# Altium PCB DSP6748_F.PcbDoc (part 2 of 16)
Units mil, origin at the board's own origin, x right, y up, seen from the top; angles counter-clockwise.
Board outline 8188.98 x 4055.12 mil, 4 copper layers (Top Layer, GND, VCC, Bottom Layer); 409 components, 262 nets, 1424 pads, 350 vias.
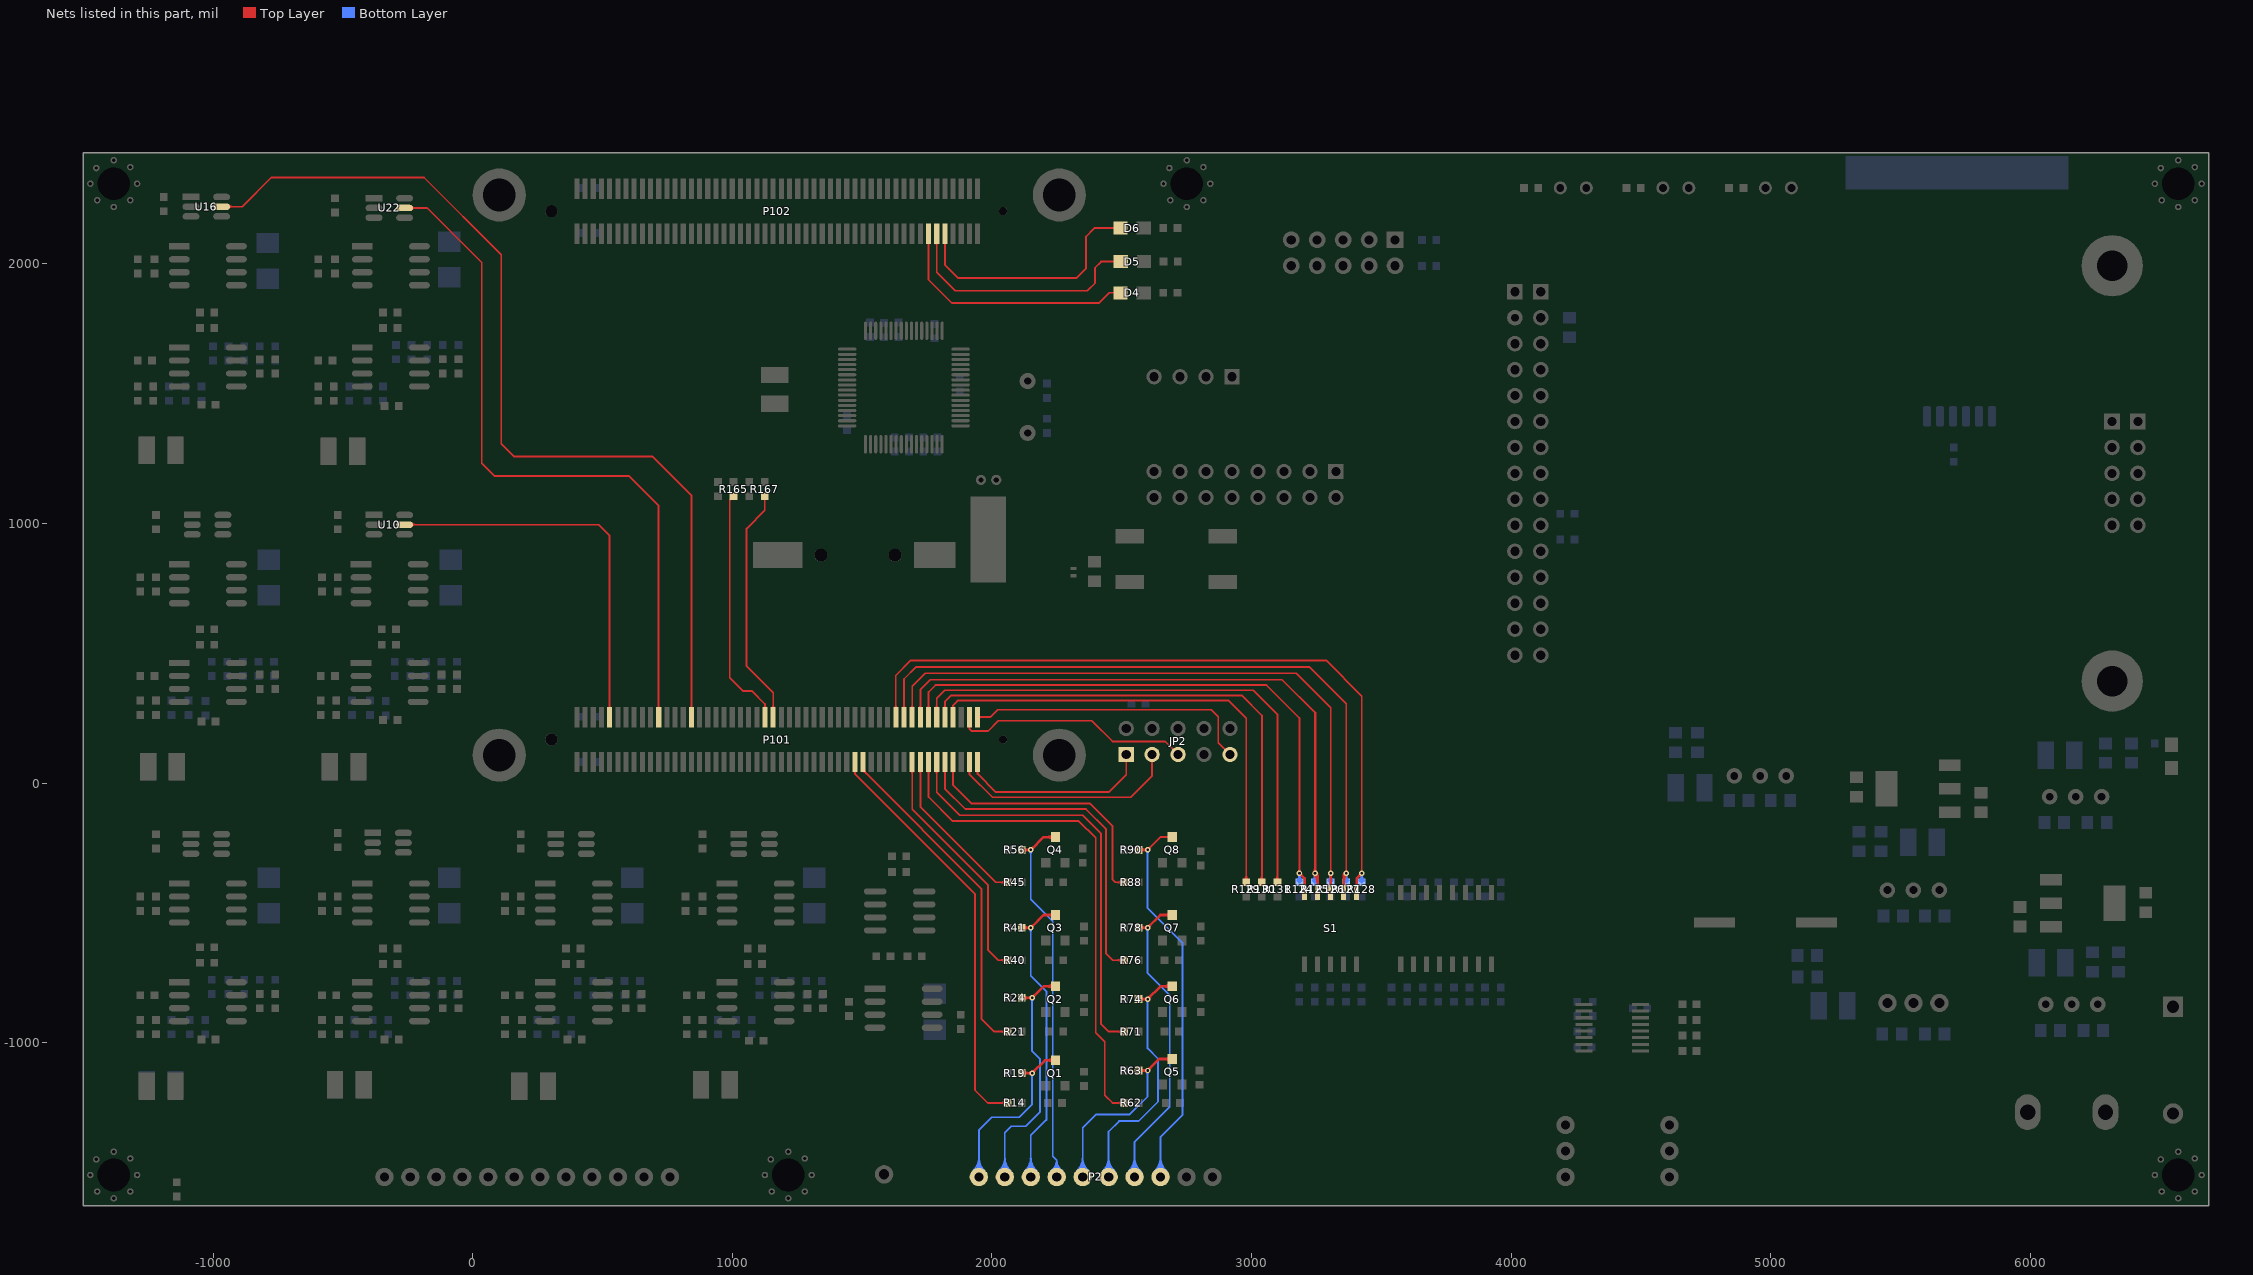
[diagram p4: the nets of this part, all layers, seen from the top]

## Via types
v1: diameter 21, hole 10, Top Layer to Bottom Layer, 244 vias
v2: diameter 20, hole 10, Top Layer to Bottom Layer, 84 vias
v3: diameter 32, hole 16, Top Layer to Bottom Layer, 11 vias
v4: diameter 24, hole 12, Top Layer to Bottom Layer, 7 vias
v5: diameter 39.37, hole 19.68, Top Layer to Bottom Layer, 3 vias
v6: diameter 30, hole 15, Top Layer to Bottom Layer, 1 vias

## Nets (pads, with @x,y where several pads share a name; then routed paths per layer and width w, separated by ;. In a path a pad name is that pad's centre, name@x,y a point inside that pad or via, vN(x,y) a via of type N, cw(c..) or ccw(c..) an arc to the next point about the centre after c; other vN are vias at no path point) (continued)
AD7276_SDATA6: P101.10 U10.5 | length 1632.5
  Top Layer w7: U10.5@-262.08,995.12 485.55,995.12 527.56,953.11 P101.10@527.56,254.13 ; P101.10@523.07,288.14 ccw(c512.24,298.97) 527.56,298.97 ccw(c542.88,298.97) P101.10@532.05,288.14 ; U10.5@-235.72,988.75 cw(c-220.35,973.39) -220.35,995.12 ; U10.5@-235.72,988.75 cw(c-220.35,973.39) -220.35,995.12 ; U10.5@-235.72,988.75 cw(c-220.35,973.39) -220.35,995.12 ; U10.5@-235.72,1001.48 ccw(c-220.35,1016.85) -220.35,995.12 ; U10.5@-235.72,1001.48 ccw(c-220.35,1016.85) -220.35,995.12 ; U10.5@-235.72,1001.48 ccw(c-220.35,1016.85) -220.35,995.12
AD7276_SDATA7: P101.30 U16.5 | length 3770
  Top Layer w7: U16.5@-967.08,2220.12 -887.59,2220.12 -775.19,2332.52 -187.52,2332.52 109.81,2035.19 109.81,1307.52 159.81,1257.52 693.15,1257.52 842.52,1108.15 P101.30@842.52,254.13 ; P101.30@838.03,288.14 ccw(c827.2,298.97) 842.52,298.97 ccw(c857.84,298.97) P101.30@847.01,288.14 ; U16.5@-940.72,2213.75 cw(c-925.35,2198.39) -925.35,2220.12 ; U16.5@-940.72,2213.75 cw(c-925.35,2198.39) -925.35,2220.12 ; U16.5@-940.72,2213.75 cw(c-925.35,2198.39) -925.35,2220.12 ; U16.5@-940.72,2226.48 ccw(c-925.35,2241.85) -925.35,2220.12 ; U16.5@-940.72,2226.48 ccw(c-925.35,2241.85) -925.35,2220.12 ; U16.5@-940.72,2226.48 ccw(c-925.35,2241.85) -925.35,2220.12
AD7276_SDATA8: P101.22 U22.5 | length 2847
  Top Layer w7: U22.5@-262.08,2215.12 -175.12,2215.12 34.81,2005.19 34.81,1232.52 84.81,1182.52 603.15,1182.52 715.55,1070.12 P101.22@715.55,254.13 ; P101.22@712.05,288.14 ccw(c703.6,296.59) 715.55,296.59 ; 715.55,301.35 ccw(c734.24,301.35) P101.22@721.03,288.14 ; U22.5@-235.72,2208.75 cw(c-220.35,2193.39) -220.35,2215.12 ; U22.5@-235.72,2208.75 cw(c-220.35,2193.39) -220.35,2215.12 ; U22.5@-235.72,2208.75 cw(c-220.35,2193.39) -220.35,2215.12 ; U22.5@-235.72,2221.48 ccw(c-220.35,2236.85) -220.35,2215.12 ; U22.5@-235.72,2221.48 ccw(c-220.35,2236.85) -220.35,2215.12 ; U22.5@-235.72,2221.48 ccw(c-220.35,2236.85) -220.35,2215.12
AST1: P2.1 Q1.3 R19.2 | length 1443.7
  Top Layer w10: R19.2@2114.81,-1117.48 v1(2154.81,-1117.48) 2204.02,-1068.27 Q1.3@2244.81,-1068.27 ; R19.2@2121.88,-1124.55 cw(c2138.95,-1141.62) 2138.95,-1117.48 ; R19.2@2121.88,-1124.55 cw(c2138.95,-1141.62) 2138.95,-1117.48 ; R19.2@2121.88,-1124.55 cw(c2138.95,-1141.62) 2138.95,-1117.48 ; R19.2@2121.88,-1110.41 ccw(c2138.95,-1093.34) 2138.95,-1117.48 ; R19.2@2121.88,-1110.41 ccw(c2138.95,-1093.34) 2138.95,-1117.48 ; R19.2@2121.88,-1110.41 ccw(c2138.95,-1093.34) 2138.95,-1117.48 ; 2141.53,-1117.48 cw(c2141.53,-1130.76) v1@2150.92,-1121.37 ; 2141.53,-1117.48 ccw(c2141.53,-1104.2) v1@2150.92,-1113.59 ; 2141.53,-1117.48 cw(c2141.53,-1130.76) v1@2150.92,-1121.37 ; 2141.53,-1117.48 ccw(c2141.53,-1104.2) v1@2150.92,-1113.59 ; 2141.53,-1117.48 ccw(c2141.53,-1104.2) v1@2150.92,-1113.59 ; 2141.53,-1117.48 cw(c2141.53,-1130.76) v1@2150.92,-1121.37 ; v1@2154.81,-1111.98 ccw(c2154.81,-1098.7) 2164.2,-1108.09 ; v1@2154.81,-1111.98 ccw(c2154.81,-1098.7) 2164.2,-1108.09 ; v1@2154.81,-1111.98 ccw(c2154.81,-1098.7) 2164.2,-1108.09 ; v1@2160.31,-1117.48 cw(c2173.59,-1117.48) 2164.2,-1108.09 ; v1@2160.31,-1117.48 cw(c2173.59,-1117.48) 2164.2,-1108.09 ; v1@2160.31,-1117.48 cw(c2173.59,-1117.48) 2164.2,-1108.09 ; 2214.11,-1068.27 cw(c2214.11,-1098.97) Q1.3@2235.82,-1077.26 ; 2214.11,-1068.27 ccw(c2214.11,-1037.57) Q1.3@2235.82,-1059.28 ; 2214.11,-1068.27 cw(c2214.11,-1098.97) Q1.3@2235.82,-1077.26 ; 2214.11,-1068.27 ccw(c2214.11,-1037.57) Q1.3@2235.82,-1059.28 ; 2214.11,-1068.27 ccw(c2214.11,-1037.57) Q1.3@2235.82,-1059.28 ; 2214.11,-1068.27 cw(c2214.11,-1098.97) Q1.3@2235.82,-1077.26
  Bottom Layer w7: P2.1@1927.23,-1494.9 ccw(c1872.72,-1440.39) 1949.81,-1440.39 ccw(c2026.9,-1440.39) P2.1@1972.39,-1494.9 ; P2.1@1932.18,-1499.85 ccw(c1889.62,-1457.29) 1949.81,-1457.29 ccw(c2010,-1457.29) P2.1@1967.44,-1499.85 ; P2.1@1937.13,-1504.8 ccw(c1906.52,-1474.19) 1949.81,-1474.19 ccw(c1993.1,-1474.19) P2.1@1962.49,-1504.8 ; P2.1@1949.81,-1517.48 1949.81,-1337.48 1999.81,-1287.48 2104.81,-1287.48 2154.81,-1237.48 v1(2154.81,-1117.48) ; v1@2149.86,-1122.43 cw(c2137.91,-1134.38) 2154.81,-1134.38 ; v1@2149.86,-1122.43 cw(c2137.91,-1134.38) 2154.81,-1134.38 ; v1@2149.86,-1122.43 cw(c2137.91,-1134.38) 2154.81,-1134.38 ; 2154.81,-1134.38 cw(c2171.71,-1134.38) v1@2159.76,-1122.43 ; 2154.81,-1134.38 cw(c2171.71,-1134.38) v1@2159.76,-1122.43 ; 2154.81,-1134.38 cw(c2171.71,-1134.38) v1@2159.76,-1122.43
AST2: P2.2 Q2.3 R24.2 | length 2253.1
  Top Layer w10: R24.2@2114.81,-827.48 v1(2154.81,-827.48) 2199.02,-783.27 Q2.3@2244.81,-783.27 ; R24.2@2121.88,-834.55 cw(c2138.95,-851.62) 2138.95,-827.48 ; R24.2@2121.88,-834.55 cw(c2138.95,-851.62) 2138.95,-827.48 ; R24.2@2121.88,-834.55 cw(c2138.95,-851.62) 2138.95,-827.48 ; R24.2@2121.88,-820.41 ccw(c2138.95,-803.34) 2138.95,-827.48 ; R24.2@2121.88,-820.41 ccw(c2138.95,-803.34) 2138.95,-827.48 ; R24.2@2121.88,-820.41 ccw(c2138.95,-803.34) 2138.95,-827.48 ; 2141.53,-827.48 cw(c2141.53,-840.76) v1@2150.92,-831.37 ; 2141.53,-827.48 ccw(c2141.53,-814.2) v1@2150.92,-823.59 ; 2141.53,-827.48 cw(c2141.53,-840.76) v1@2150.92,-831.37 ; 2141.53,-827.48 ccw(c2141.53,-814.2) v1@2150.92,-823.59 ; 2141.53,-827.48 ccw(c2141.53,-814.2) v1@2150.92,-823.59 ; 2141.53,-827.48 cw(c2141.53,-840.76) v1@2150.92,-831.37 ; v1@2154.81,-821.98 ccw(c2154.81,-808.7) 2164.2,-818.09 ; v1@2154.81,-821.98 ccw(c2154.81,-808.7) 2164.2,-818.09 ; v1@2154.81,-821.98 ccw(c2154.81,-808.7) 2164.2,-818.09 ; v1@2160.31,-827.48 cw(c2173.59,-827.48) 2164.2,-818.09 ; v1@2160.31,-827.48 cw(c2173.59,-827.48) 2164.2,-818.09 ; v1@2160.31,-827.48 cw(c2173.59,-827.48) 2164.2,-818.09 ; 2214.11,-783.27 cw(c2214.11,-813.97) Q2.3@2235.82,-792.26 ; 2214.11,-783.27 ccw(c2214.11,-752.57) Q2.3@2235.82,-774.28 ; 2214.11,-783.27 cw(c2214.11,-813.97) Q2.3@2235.82,-792.26 ; 2214.11,-783.27 ccw(c2214.11,-752.57) Q2.3@2235.82,-774.28 ; 2214.11,-783.27 ccw(c2214.11,-752.57) Q2.3@2235.82,-774.28 ; 2214.11,-783.27 cw(c2214.11,-813.97) Q2.3@2235.82,-792.26
  Bottom Layer w7: P2.2@2049.81,-1517.48 2049.81,-1347.48 2074.81,-1322.48 2129.81,-1322.48 2184.81,-1267.48 2184.81,-1062.48 2154.81,-1032.48 v1(2154.81,-827.48) ; P2.2@2027.23,-1494.9 ccw(c1972.72,-1440.39) 2049.81,-1440.39 ; P2.2@2027.23,-1494.9 ccw(c1972.72,-1440.39) 2049.81,-1440.39 ; P2.2@2027.23,-1494.9 ccw(c1972.72,-1440.39) 2049.81,-1440.39 ; P2.2@2032.18,-1499.85 ccw(c1989.62,-1457.29) 2049.81,-1457.29 ; P2.2@2032.18,-1499.85 ccw(c1989.62,-1457.29) 2049.81,-1457.29 ; P2.2@2032.18,-1499.85 ccw(c1989.62,-1457.29) 2049.81,-1457.29 ; P2.2@2037.13,-1504.8 ccw(c2006.52,-1474.19) 2049.81,-1474.19 ; P2.2@2037.13,-1504.8 ccw(c2006.52,-1474.19) 2049.81,-1474.19 ; P2.2@2037.13,-1504.8 ccw(c2006.52,-1474.19) 2049.81,-1474.19 ; 2049.81,-1474.19 ccw(c2093.1,-1474.19) P2.2@2062.49,-1504.8 ; 2049.81,-1474.19 ccw(c2093.1,-1474.19) P2.2@2062.49,-1504.8 ; 2049.81,-1474.19 ccw(c2093.1,-1474.19) P2.2@2062.49,-1504.8 ; 2049.81,-1457.29 ccw(c2110,-1457.29) P2.2@2067.44,-1499.85 ; 2049.81,-1457.29 ccw(c2110,-1457.29) P2.2@2067.44,-1499.85 ; 2049.81,-1457.29 ccw(c2110,-1457.29) P2.2@2067.44,-1499.85 ; 2049.81,-1440.39 ccw(c2126.9,-1440.39) P2.2@2072.39,-1494.9 ; 2049.81,-1440.39 ccw(c2126.9,-1440.39) P2.2@2072.39,-1494.9 ; 2049.81,-1440.39 ccw(c2126.9,-1440.39) P2.2@2072.39,-1494.9 ; v1@2149.86,-832.43 cw(c2137.91,-844.38) 2154.81,-844.38 ; v1@2149.86,-832.43 cw(c2137.91,-844.38) 2154.81,-844.38 ; v1@2149.86,-832.43 cw(c2137.91,-844.38) 2154.81,-844.38 ; 2154.81,-844.38 cw(c2171.71,-844.38) v1@2159.76,-832.43 ; 2154.81,-844.38 cw(c2171.71,-844.38) v1@2159.76,-832.43 ; 2154.81,-844.38 cw(c2171.71,-844.38) v1@2159.76,-832.43
AST3: P2.3 Q3.3 R41.2 | length 2474.3
  Top Layer w10: R41.2@2114.81,-557.48 v1(2149.81,-557.48) 2199.02,-508.27 Q3.3@2244.81,-508.27 ; R41.2@2121.88,-564.55 cw(c2138.95,-581.62) 2138.95,-557.48 ; R41.2@2121.88,-564.55 cw(c2138.95,-581.62) 2138.95,-557.48 ; R41.2@2121.88,-564.55 cw(c2138.95,-581.62) 2138.95,-557.48 ; R41.2@2121.88,-550.41 ccw(c2138.95,-533.34) 2138.95,-557.48 ; R41.2@2121.88,-550.41 ccw(c2138.95,-533.34) 2138.95,-557.48 ; R41.2@2121.88,-550.41 ccw(c2138.95,-533.34) 2138.95,-557.48 ; 2136.53,-557.48 cw(c2136.53,-570.76) v1@2145.92,-561.37 ; 2136.53,-557.48 ccw(c2136.53,-544.2) v1@2145.92,-553.59 ; 2136.53,-557.48 cw(c2136.53,-570.76) v1@2145.92,-561.37 ; 2136.53,-557.48 ccw(c2136.53,-544.2) v1@2145.92,-553.59 ; 2136.53,-557.48 ccw(c2136.53,-544.2) v1@2145.92,-553.59 ; 2136.53,-557.48 cw(c2136.53,-570.76) v1@2145.92,-561.37 ; v1@2149.81,-551.98 ccw(c2149.81,-538.7) 2159.2,-548.09 ; v1@2149.81,-551.98 ccw(c2149.81,-538.7) 2159.2,-548.09 ; v1@2149.81,-551.98 ccw(c2149.81,-538.7) 2159.2,-548.09 ; v1@2155.31,-557.48 cw(c2168.59,-557.48) 2159.2,-548.09 ; v1@2155.31,-557.48 cw(c2168.59,-557.48) 2159.2,-548.09 ; v1@2155.31,-557.48 cw(c2168.59,-557.48) 2159.2,-548.09 ; 2214.11,-508.27 cw(c2214.11,-538.97) Q3.3@2235.82,-517.26 ; 2214.11,-508.27 ccw(c2214.11,-477.57) Q3.3@2235.82,-499.28 ; 2214.11,-508.27 cw(c2214.11,-538.97) Q3.3@2235.82,-517.26 ; 2214.11,-508.27 ccw(c2214.11,-477.57) Q3.3@2235.82,-499.28 ; 2214.11,-508.27 ccw(c2214.11,-477.57) Q3.3@2235.82,-499.28 ; 2214.11,-508.27 cw(c2214.11,-538.97) Q3.3@2235.82,-517.26
  Bottom Layer w7: P2.3@2149.81,-1517.48 2149.81,-1357.48 2209.81,-1297.48 2209.81,-802.48 2149.81,-742.48 v1(2149.81,-557.48) ; P2.3@2127.23,-1494.9 ccw(c2072.72,-1440.39) 2149.81,-1440.39 ; P2.3@2127.23,-1494.9 ccw(c2072.72,-1440.39) 2149.81,-1440.39 ; P2.3@2127.23,-1494.9 ccw(c2072.72,-1440.39) 2149.81,-1440.39 ; P2.3@2132.18,-1499.85 ccw(c2089.62,-1457.29) 2149.81,-1457.29 ; P2.3@2132.18,-1499.85 ccw(c2089.62,-1457.29) 2149.81,-1457.29 ; P2.3@2132.18,-1499.85 ccw(c2089.62,-1457.29) 2149.81,-1457.29 ; P2.3@2137.13,-1504.8 ccw(c2106.52,-1474.19) 2149.81,-1474.19 ; P2.3@2137.13,-1504.8 ccw(c2106.52,-1474.19) 2149.81,-1474.19 ; P2.3@2137.13,-1504.8 ccw(c2106.52,-1474.19) 2149.81,-1474.19 ; v1@2144.86,-562.43 cw(c2132.91,-574.38) 2149.81,-574.38 ; v1@2144.86,-562.43 cw(c2132.91,-574.38) 2149.81,-574.38 ; v1@2144.86,-562.43 cw(c2132.91,-574.38) 2149.81,-574.38 ; 2149.81,-1474.19 ccw(c2193.1,-1474.19) P2.3@2162.49,-1504.8 ; 2149.81,-1474.19 ccw(c2193.1,-1474.19) P2.3@2162.49,-1504.8 ; 2149.81,-1474.19 ccw(c2193.1,-1474.19) P2.3@2162.49,-1504.8 ; 2149.81,-1457.29 ccw(c2210,-1457.29) P2.3@2167.44,-1499.85 ; 2149.81,-1457.29 ccw(c2210,-1457.29) P2.3@2167.44,-1499.85 ; 2149.81,-1457.29 ccw(c2210,-1457.29) P2.3@2167.44,-1499.85 ; 2149.81,-1440.39 ccw(c2226.9,-1440.39) P2.3@2172.39,-1494.9 ; 2149.81,-1440.39 ccw(c2226.9,-1440.39) P2.3@2172.39,-1494.9 ; 2149.81,-1440.39 ccw(c2226.9,-1440.39) P2.3@2172.39,-1494.9 ; 2149.81,-574.38 cw(c2166.71,-574.38) v1@2154.76,-562.43 ; 2149.81,-574.38 cw(c2166.71,-574.38) v1@2154.76,-562.43 ; 2149.81,-574.38 cw(c2166.71,-574.38) v1@2154.76,-562.43
AST4: P2.4 Q4.3 R56.2 | length 2129.7
  Top Layer w10: R56.2@2114.81,-257.48 v1(2149.81,-257.48) 2199.02,-208.27 Q4.3@2244.81,-208.27 ; R56.2@2121.88,-264.55 cw(c2138.95,-281.62) 2138.95,-257.48 ; R56.2@2121.88,-264.55 cw(c2138.95,-281.62) 2138.95,-257.48 ; R56.2@2121.88,-264.55 cw(c2138.95,-281.62) 2138.95,-257.48 ; R56.2@2121.88,-250.41 ccw(c2138.95,-233.34) 2138.95,-257.48 ; R56.2@2121.88,-250.41 ccw(c2138.95,-233.34) 2138.95,-257.48 ; R56.2@2121.88,-250.41 ccw(c2138.95,-233.34) 2138.95,-257.48 ; 2136.53,-257.48 cw(c2136.53,-270.76) v1@2145.92,-261.37 ; 2136.53,-257.48 ccw(c2136.53,-244.2) v1@2145.92,-253.59 ; 2136.53,-257.48 cw(c2136.53,-270.76) v1@2145.92,-261.37 ; 2136.53,-257.48 ccw(c2136.53,-244.2) v1@2145.92,-253.59 ; 2136.53,-257.48 ccw(c2136.53,-244.2) v1@2145.92,-253.59 ; 2136.53,-257.48 cw(c2136.53,-270.76) v1@2145.92,-261.37 ; v1@2149.81,-251.98 ccw(c2149.81,-238.7) 2159.2,-248.09 ; v1@2149.81,-251.98 ccw(c2149.81,-238.7) 2159.2,-248.09 ; v1@2149.81,-251.98 ccw(c2149.81,-238.7) 2159.2,-248.09 ; v1@2155.31,-257.48 cw(c2168.59,-257.48) 2159.2,-248.09 ; v1@2155.31,-257.48 cw(c2168.59,-257.48) 2159.2,-248.09 ; v1@2155.31,-257.48 cw(c2168.59,-257.48) 2159.2,-248.09 ; 2214.11,-208.27 cw(c2214.11,-238.97) Q4.3@2235.82,-217.26 ; 2214.11,-208.27 ccw(c2214.11,-177.57) Q4.3@2235.82,-199.28 ; 2214.11,-208.27 cw(c2214.11,-238.97) Q4.3@2235.82,-217.26 ; 2214.11,-208.27 ccw(c2214.11,-177.57) Q4.3@2235.82,-199.28 ; 2214.11,-208.27 ccw(c2214.11,-177.57) Q4.3@2235.82,-199.28 ; 2214.11,-208.27 cw(c2214.11,-238.97) Q4.3@2235.82,-217.26
  Bottom Layer w7: v1(2149.81,-257.48) 2149.81,-447.48 2234.81,-532.48 2234.81,-1437.48 2249.81,-1452.48 ; P2.4@2230.29,-1492.2 ccw(c2199.63,-1452.48) 2249.81,-1452.48 ; P2.4@2234.57,-1497.74 ccw(c2210.63,-1466.73) 2249.81,-1466.73 ccw(c2288.99,-1466.73) P2.4@2265.05,-1497.74 ; P2.4@2238.85,-1503.29 ccw(c2221.63,-1480.98) 2249.81,-1480.98 ccw(c2277.99,-1480.98) P2.4@2260.77,-1503.29 ; P2.4@2249.81,-1517.48 2249.81,-1452.48 ; P2.4@2269.32,-1492.2 cw(c2299.99,-1452.48) 2249.81,-1452.48 ; v1@2144.86,-262.43 cw(c2132.91,-274.38) 2149.81,-274.38 ; v1@2144.86,-262.43 cw(c2132.91,-274.38) 2149.81,-274.38 ; v1@2144.86,-262.43 cw(c2132.91,-274.38) 2149.81,-274.38 ; 2149.81,-274.38 cw(c2166.71,-274.38) v1@2154.76,-262.43 ; 2149.81,-274.38 cw(c2166.71,-274.38) v1@2154.76,-262.43 ; 2149.81,-274.38 cw(c2166.71,-274.38) v1@2154.76,-262.43
AST5: P2.5 Q5.3 R63.2 | length 1484.9
  Top Layer w10: R63.2@2564.81,-1107.48 v1(2599.81,-1107.48) 2644.02,-1063.27 Q5.3@2694.81,-1063.27 ; R63.2@2571.88,-1114.55 cw(c2588.95,-1131.62) 2588.95,-1107.48 ; R63.2@2571.88,-1114.55 cw(c2588.95,-1131.62) 2588.95,-1107.48 ; R63.2@2571.88,-1114.55 cw(c2588.95,-1131.62) 2588.95,-1107.48 ; R63.2@2571.88,-1100.41 ccw(c2588.95,-1083.34) 2588.95,-1107.48 ; R63.2@2571.88,-1100.41 ccw(c2588.95,-1083.34) 2588.95,-1107.48 ; R63.2@2571.88,-1100.41 ccw(c2588.95,-1083.34) 2588.95,-1107.48 ; 2586.53,-1107.48 cw(c2586.53,-1120.76) v1@2595.92,-1111.37 ; 2586.53,-1107.48 ccw(c2586.53,-1094.2) v1@2595.92,-1103.59 ; 2586.53,-1107.48 cw(c2586.53,-1120.76) v1@2595.92,-1111.37 ; 2586.53,-1107.48 ccw(c2586.53,-1094.2) v1@2595.92,-1103.59 ; 2586.53,-1107.48 ccw(c2586.53,-1094.2) v1@2595.92,-1103.59 ; 2586.53,-1107.48 cw(c2586.53,-1120.76) v1@2595.92,-1111.37 ; v1@2599.81,-1101.98 ccw(c2599.81,-1088.7) 2609.2,-1098.09 ; v1@2599.81,-1101.98 ccw(c2599.81,-1088.7) 2609.2,-1098.09 ; v1@2599.81,-1101.98 ccw(c2599.81,-1088.7) 2609.2,-1098.09 ; v1@2605.31,-1107.48 cw(c2618.59,-1107.48) 2609.2,-1098.09 ; v1@2605.31,-1107.48 cw(c2618.59,-1107.48) 2609.2,-1098.09 ; v1@2605.31,-1107.48 cw(c2618.59,-1107.48) 2609.2,-1098.09 ; 2664.11,-1063.27 cw(c2664.11,-1093.97) Q5.3@2685.82,-1072.26 ; 2664.11,-1063.27 ccw(c2664.11,-1032.57) Q5.3@2685.82,-1054.28 ; 2664.11,-1063.27 cw(c2664.11,-1093.97) Q5.3@2685.82,-1072.26 ; 2664.11,-1063.27 ccw(c2664.11,-1032.57) Q5.3@2685.82,-1054.28 ; 2664.11,-1063.27 ccw(c2664.11,-1032.57) Q5.3@2685.82,-1054.28 ; 2664.11,-1063.27 cw(c2664.11,-1093.97) Q5.3@2685.82,-1072.26
  Bottom Layer w7: P2.5@2327.23,-1494.9 ccw(c2272.72,-1440.39) 2349.81,-1440.39 ccw(c2426.9,-1440.39) P2.5@2372.39,-1494.9 ; P2.5@2332.18,-1499.85 ccw(c2289.62,-1457.29) 2349.81,-1457.29 ccw(c2410,-1457.29) P2.5@2367.44,-1499.85 ; P2.5@2337.13,-1504.8 ccw(c2306.52,-1474.19) 2349.81,-1474.19 ccw(c2393.1,-1474.19) P2.5@2362.49,-1504.8 ; P2.5@2349.81,-1517.48 2349.81,-1327.48 2399.81,-1277.48 2529.81,-1277.48 2599.81,-1207.48 v1(2599.81,-1107.48) ; v1@2594.86,-1112.43 cw(c2582.91,-1124.38) 2599.81,-1124.38 ; v1@2594.86,-1112.43 cw(c2582.91,-1124.38) 2599.81,-1124.38 ; v1@2594.86,-1112.43 cw(c2582.91,-1124.38) 2599.81,-1124.38 ; 2599.81,-1124.38 cw(c2616.71,-1124.38) v1@2604.76,-1112.43 ; 2599.81,-1124.38 cw(c2616.71,-1124.38) v1@2604.76,-1112.43 ; 2599.81,-1124.38 cw(c2616.71,-1124.38) v1@2604.76,-1112.43
AST6: P2.6 Q6.3 R74.2 | length 1721.5
  Top Layer w10: R74.2@2564.81,-832.48 v1(2599.81,-832.48) 2649.02,-783.27 Q6.3@2694.81,-783.27 ; R74.2@2571.88,-839.55 cw(c2588.95,-856.62) 2588.95,-832.48 ; R74.2@2571.88,-839.55 cw(c2588.95,-856.62) 2588.95,-832.48 ; R74.2@2571.88,-839.55 cw(c2588.95,-856.62) 2588.95,-832.48 ; R74.2@2571.88,-825.41 ccw(c2588.95,-808.34) 2588.95,-832.48 ; R74.2@2571.88,-825.41 ccw(c2588.95,-808.34) 2588.95,-832.48 ; R74.2@2571.88,-825.41 ccw(c2588.95,-808.34) 2588.95,-832.48 ; 2586.53,-832.48 cw(c2586.53,-845.76) v1@2595.92,-836.37 ; 2586.53,-832.48 ccw(c2586.53,-819.2) v1@2595.92,-828.59 ; 2586.53,-832.48 cw(c2586.53,-845.76) v1@2595.92,-836.37 ; 2586.53,-832.48 ccw(c2586.53,-819.2) v1@2595.92,-828.59 ; 2586.53,-832.48 ccw(c2586.53,-819.2) v1@2595.92,-828.59 ; 2586.53,-832.48 cw(c2586.53,-845.76) v1@2595.92,-836.37 ; v1@2599.81,-826.98 ccw(c2599.81,-813.7) 2609.2,-823.09 ; v1@2599.81,-826.98 ccw(c2599.81,-813.7) 2609.2,-823.09 ; v1@2599.81,-826.98 ccw(c2599.81,-813.7) 2609.2,-823.09 ; v1@2605.31,-832.48 cw(c2618.59,-832.48) 2609.2,-823.09 ; v1@2605.31,-832.48 cw(c2618.59,-832.48) 2609.2,-823.09 ; v1@2605.31,-832.48 cw(c2618.59,-832.48) 2609.2,-823.09 ; 2664.11,-783.27 cw(c2664.11,-813.97) Q6.3@2685.82,-792.26 ; 2664.11,-783.27 ccw(c2664.11,-752.57) Q6.3@2685.82,-774.28 ; 2664.11,-783.27 cw(c2664.11,-813.97) Q6.3@2685.82,-792.26 ; 2664.11,-783.27 ccw(c2664.11,-752.57) Q6.3@2685.82,-774.28 ; 2664.11,-783.27 ccw(c2664.11,-752.57) Q6.3@2685.82,-774.28 ; 2664.11,-783.27 cw(c2664.11,-813.97) Q6.3@2685.82,-792.26
  Bottom Layer w7: P2.6@2427.23,-1494.9 ccw(c2372.72,-1440.39) 2449.81,-1440.39 ccw(c2526.9,-1440.39) P2.6@2472.39,-1494.9 ; P2.6@2432.18,-1499.85 ccw(c2389.62,-1457.29) 2449.81,-1457.29 ccw(c2510,-1457.29) P2.6@2467.44,-1499.85 ; P2.6@2437.13,-1504.8 ccw(c2406.52,-1474.19) 2449.81,-1474.19 ccw(c2493.1,-1474.19) P2.6@2462.49,-1504.8 ; P2.6@2449.81,-1517.48 2449.81,-1342.48 2489.81,-1302.48 2564.81,-1302.48 2639.81,-1227.48 2639.81,-1062.48 2599.81,-1022.48 v1(2599.81,-832.48) ; v1@2594.86,-837.43 cw(c2582.91,-849.38) 2599.81,-849.38 ; v1@2594.86,-837.43 cw(c2582.91,-849.38) 2599.81,-849.38 ; v1@2594.86,-837.43 cw(c2582.91,-849.38) 2599.81,-849.38 ; 2599.81,-849.38 cw(c2616.71,-849.38) v1@2604.76,-837.43 ; 2599.81,-849.38 cw(c2616.71,-849.38) v1@2604.76,-837.43 ; 2599.81,-849.38 cw(c2616.71,-849.38) v1@2604.76,-837.43
AST7: P2.7 Q7.3 R78.2 | length 1948.4
  Top Layer w10: R78.2@2564.81,-557.48 v1(2599.81,-557.48) 2649.02,-508.27 Q7.3@2694.81,-508.27 ; R78.2@2571.88,-564.55 cw(c2588.95,-581.62) 2588.95,-557.48 ; R78.2@2571.88,-564.55 cw(c2588.95,-581.62) 2588.95,-557.48 ; R78.2@2571.88,-564.55 cw(c2588.95,-581.62) 2588.95,-557.48 ; R78.2@2571.88,-550.41 ccw(c2588.95,-533.34) 2588.95,-557.48 ; R78.2@2571.88,-550.41 ccw(c2588.95,-533.34) 2588.95,-557.48 ; R78.2@2571.88,-550.41 ccw(c2588.95,-533.34) 2588.95,-557.48 ; 2586.53,-557.48 cw(c2586.53,-570.76) v1@2595.92,-561.37 ; 2586.53,-557.48 ccw(c2586.53,-544.2) v1@2595.92,-553.59 ; 2586.53,-557.48 cw(c2586.53,-570.76) v1@2595.92,-561.37 ; 2586.53,-557.48 ccw(c2586.53,-544.2) v1@2595.92,-553.59 ; 2586.53,-557.48 ccw(c2586.53,-544.2) v1@2595.92,-553.59 ; 2586.53,-557.48 cw(c2586.53,-570.76) v1@2595.92,-561.37 ; v1@2599.81,-551.98 ccw(c2599.81,-538.7) 2609.2,-548.09 ; v1@2599.81,-551.98 ccw(c2599.81,-538.7) 2609.2,-548.09 ; v1@2599.81,-551.98 ccw(c2599.81,-538.7) 2609.2,-548.09 ; v1@2605.31,-557.48 cw(c2618.59,-557.48) 2609.2,-548.09 ; v1@2605.31,-557.48 cw(c2618.59,-557.48) 2609.2,-548.09 ; v1@2605.31,-557.48 cw(c2618.59,-557.48) 2609.2,-548.09 ; 2664.11,-508.27 cw(c2664.11,-538.97) Q7.3@2685.82,-517.26 ; 2664.11,-508.27 ccw(c2664.11,-477.57) Q7.3@2685.82,-499.28 ; 2664.11,-508.27 cw(c2664.11,-538.97) Q7.3@2685.82,-517.26 ; 2664.11,-508.27 ccw(c2664.11,-477.57) Q7.3@2685.82,-499.28 ; 2664.11,-508.27 ccw(c2664.11,-477.57) Q7.3@2685.82,-499.28 ; 2664.11,-508.27 cw(c2664.11,-538.97) Q7.3@2685.82,-517.26
  Bottom Layer w7: P2.7@2527.23,-1494.9 ccw(c2472.72,-1440.39) 2549.81,-1440.39 ccw(c2626.9,-1440.39) P2.7@2572.39,-1494.9 ; P2.7@2532.18,-1499.85 ccw(c2489.62,-1457.29) 2549.81,-1457.29 ccw(c2610,-1457.29) P2.7@2567.44,-1499.85 ; P2.7@2537.13,-1504.8 ccw(c2506.52,-1474.19) 2549.81,-1474.19 ccw(c2593.1,-1474.19) P2.7@2562.49,-1504.8 ; P2.7@2549.81,-1517.48 2549.81,-1382.48 2684.81,-1247.48 2684.81,-817.48 2599.81,-732.48 v1(2599.81,-557.48) ; v1@2594.86,-562.43 cw(c2582.91,-574.38) 2599.81,-574.38 ; v1@2594.86,-562.43 cw(c2582.91,-574.38) 2599.81,-574.38 ; v1@2594.86,-562.43 cw(c2582.91,-574.38) 2599.81,-574.38 ; 2599.81,-574.38 cw(c2616.71,-574.38) v1@2604.76,-562.43 ; 2599.81,-574.38 cw(c2616.71,-574.38) v1@2604.76,-562.43 ; 2599.81,-574.38 cw(c2616.71,-574.38) v1@2604.76,-562.43
AST8: P2.8 Q8.3 R90.2 | length 2345.7
  Top Layer w7: R90.2@2564.81,-257.48 v1(2599.81,-257.48) ; Q8.3@2694.81,-208.27 2649.02,-208.27 v1(2599.81,-257.48) ; R90.2@2572.94,-265.61 cw(c2592.57,-285.24) v1@2592.57,-257.48 ; R90.2@2572.94,-265.61 cw(c2592.57,-285.24) v1@2592.57,-257.48 ; R90.2@2572.94,-265.61 cw(c2592.57,-285.24) v1@2592.57,-257.48 ; R90.2@2572.94,-249.35 ccw(c2592.57,-229.72) v1@2592.57,-257.48 ; R90.2@2572.94,-249.35 ccw(c2592.57,-229.72) v1@2592.57,-257.48 ; R90.2@2572.94,-249.35 ccw(c2592.57,-229.72) v1@2592.57,-257.48 ; 2581.83,-260.36 cw(c2585.95,-275.75) v1@2595.58,-263.06 ; 2581.83,-260.36 cw(c2585.95,-275.75) v1@2595.58,-263.06 ; 2581.83,-260.36 cw(c2585.95,-275.75) v1@2595.58,-263.06 ; 2581.83,-254.6 ccw(c2585.95,-239.21) v1@2595.58,-251.9 ; 2581.83,-254.6 ccw(c2585.95,-239.21) v1@2595.58,-251.9 ; 2581.83,-254.6 ccw(c2585.95,-239.21) v1@2595.58,-251.9 ; 2582.91,-257.48 cw(c2582.91,-274.38) v1@2594.86,-262.43 ; 2582.91,-257.48 ccw(c2582.91,-240.58) v1@2594.86,-252.53 ; 2582.91,-257.48 cw(c2582.91,-274.38) v1@2594.86,-262.43 ; 2582.91,-257.48 ccw(c2582.91,-240.58) v1@2594.86,-252.53 ; 2582.91,-257.48 ccw(c2582.91,-240.58) v1@2594.86,-252.53 ; 2582.91,-257.48 cw(c2582.91,-274.38) v1@2594.86,-262.43 ; 2587.37,-258.87 ccw(c2584.65,-248.73) v1@2593.75,-253.98 ; 2587.37,-258.87 ccw(c2584.65,-248.73) v1@2593.75,-253.98 ; 2587.37,-258.87 ccw(c2584.65,-248.73) v1@2593.75,-253.98 ; 2587.37,-256.09 cw(c2584.65,-266.23) v1@2593.75,-260.98 ; 2587.37,-256.09 cw(c2584.65,-266.23) v1@2593.75,-260.98 ; 2587.37,-256.09 cw(c2584.65,-266.23) v1@2593.75,-260.98 ; v1(2599.81,-257.48) cw(c2611.8,-259.93) 2608.63,-248.12 ccw(c2611.8,-259.93) v1(2599.81,-257.48) ; v1(2599.81,-257.48) ccw(c2597.36,-245.49) 2609.17,-248.66 cw(c2597.36,-245.49) v1(2599.81,-257.48) ; v1@2599.81,-250.48 ccw(c2599.81,-233.58) 2611.76,-245.53 ; v1@2599.81,-250.48 ccw(c2599.81,-233.58) 2611.76,-245.53 ; v1@2599.81,-250.48 ccw(c2599.81,-233.58) 2611.76,-245.53 ; v1@2606.81,-257.48 cw(c2623.71,-257.48) 2611.76,-245.53 ; v1@2606.81,-257.48 cw(c2623.71,-257.48) 2611.76,-245.53 ; v1@2606.81,-257.48 cw(c2623.71,-257.48) 2611.76,-245.53
  Bottom Layer w7: v1(2599.81,-257.48) 2599.81,-482.48 2734.81,-617.48 2734.81,-1277.48 2649.81,-1362.48 P2.8@2649.81,-1517.48 ; P2.8@2627.23,-1494.9 ccw(c2572.72,-1440.39) 2649.81,-1440.39 ccw(c2726.9,-1440.39) P2.8@2672.39,-1494.9 ; P2.8@2632.18,-1499.85 ccw(c2589.62,-1457.29) 2649.81,-1457.29 ccw(c2710,-1457.29) P2.8@2667.44,-1499.85 ; P2.8@2637.13,-1504.8 ccw(c2606.52,-1474.19) 2649.81,-1474.19 ccw(c2693.1,-1474.19) P2.8@2662.49,-1504.8 ; v1@2594.86,-262.43 cw(c2582.91,-274.38) 2599.81,-274.38 ; v1@2594.86,-262.43 cw(c2582.91,-274.38) 2599.81,-274.38 ; v1@2594.86,-262.43 cw(c2582.91,-274.38) 2599.81,-274.38 ; 2599.81,-274.38 cw(c2616.71,-274.38) v1@2604.76,-262.43 ; 2599.81,-274.38 cw(c2616.71,-274.38) v1@2604.76,-262.43 ; 2599.81,-274.38 cw(c2616.71,-274.38) v1@2604.76,-262.43
AST_CTRL1: P101.69 R14.1 | length 1755.5
  Top Layer w7: P101.69@1467.95,46.9 cw(c1457.12,36.07) 1472.44,36.07 cw(c1487.76,36.07) P101.69@1476.93,46.9 ; P101.69@1472.44,80.91 1472.44,35.89 1934.81,-426.48 1934.81,-1182.48 1984.81,-1232.48 R14.1@2059.81,-1232.48 ; 2032.05,-1232.48 cw(c2032.05,-1260.24) R14.1@2051.68,-1240.61 ; 2032.05,-1232.48 ccw(c2032.05,-1204.72) R14.1@2051.68,-1224.35 ; 2032.05,-1232.48 cw(c2032.05,-1260.24) R14.1@2051.68,-1240.61 ; 2032.05,-1232.48 ccw(c2032.05,-1204.72) R14.1@2051.68,-1224.35 ; 2032.05,-1232.48 ccw(c2032.05,-1204.72) R14.1@2051.68,-1224.35 ; 2032.05,-1232.48 cw(c2032.05,-1260.24) R14.1@2051.68,-1240.61
AST_CTRL2: P101.71 R21.1 | length 1452.8
  Top Layer w7: P101.71@1503.94,45.04 cw(c1503.94,36.95) P101.71@1509.66,42.67 ; P101.71@1503.94,80.91 1503.94,48.39 1959.81,-407.48 1959.81,-907.48 2009.81,-957.48 R21.1@2059.81,-957.48 ; P101.71@1510.28,51.38 ccw(c1532.83,51.38) 1516.89,35.44 ; 2032.05,-957.48 cw(c2032.05,-985.24) R21.1@2051.68,-965.61 ; 2032.05,-957.48 ccw(c2032.05,-929.72) R21.1@2051.68,-949.35 ; 2032.05,-957.48 cw(c2032.05,-985.24) R21.1@2051.68,-965.61 ; 2032.05,-957.48 ccw(c2032.05,-929.72) R21.1@2051.68,-949.35 ; 2032.05,-957.48 ccw(c2032.05,-929.72) R21.1@2051.68,-949.35 ; 2032.05,-957.48 cw(c2032.05,-985.24) R21.1@2051.68,-965.61
AST_CTRL3: P101.83 R40.1 | length 1090.8
  Top Layer w7: P101.83@1688.43,46.9 cw(c1677.6,36.07) 1692.92,36.07 cw(c1708.24,36.07) P101.83@1697.41,46.9 ; P101.83@1692.92,80.91 1692.92,-100.59 1984.81,-392.48 1984.81,-642.48 2024.81,-682.48 R40.1@2059.81,-682.48 ; 2032.05,-682.48 cw(c2032.05,-710.24) R40.1@2051.68,-690.61 ; 2032.05,-682.48 ccw(c2032.05,-654.72) R40.1@2051.68,-674.35 ; 2032.05,-682.48 cw(c2032.05,-710.24) R40.1@2051.68,-690.61 ; 2032.05,-682.48 ccw(c2032.05,-654.72) R40.1@2051.68,-674.35 ; 2032.05,-682.48 ccw(c2032.05,-654.72) R40.1@2051.68,-674.35 ; 2032.05,-682.48 cw(c2032.05,-710.24) R40.1@2051.68,-690.61
AST_CTRL4: P101.85 R45.1 | length 783.6
  Top Layer w7: P101.85@1719.92,46.9 cw(c1709.09,36.07) 1724.41,36.07 cw(c1739.73,36.07) P101.85@1728.9,46.9 ; P101.85@1724.41,80.91 1724.41,-92.08 2014.81,-382.48 R45.1@2059.81,-382.48 ; 2032.05,-382.48 cw(c2032.05,-410.24) R45.1@2051.68,-390.61 ; 2032.05,-382.48 ccw(c2032.05,-354.72) R45.1@2051.68,-374.35 ; 2032.05,-382.48 cw(c2032.05,-410.24) R45.1@2051.68,-390.61 ; 2032.05,-382.48 ccw(c2032.05,-354.72) R45.1@2051.68,-374.35 ; 2032.05,-382.48 ccw(c2032.05,-354.72) R45.1@2051.68,-374.35 ; 2032.05,-382.48 cw(c2032.05,-410.24) R45.1@2051.68,-390.61
AST_CTRL5: P101.87 R62.1 | length 2091.6
  Top Layer w7: P101.87@1751.42,46.9 cw(c1740.59,36.07) 1755.91,36.07 cw(c1771.23,36.07) P101.87@1760.4,46.9 ; P101.87@1755.91,80.91 1755.91,-53.62 1848.77,-146.48 2334.77,-146.48 2399.81,-211.52 2399.81,-962.48 2434.81,-997.48 2434.81,-1202.48 2464.81,-1232.48 R62.1@2509.81,-1232.48 ; 2482.05,-1232.48 cw(c2482.05,-1260.24) R62.1@2501.68,-1240.61 ; 2482.05,-1232.48 ccw(c2482.05,-1204.72) R62.1@2501.68,-1224.35 ; 2482.05,-1232.48 cw(c2482.05,-1260.24) R62.1@2501.68,-1240.61 ; 2482.05,-1232.48 ccw(c2482.05,-1204.72) R62.1@2501.68,-1224.35 ; 2482.05,-1232.48 ccw(c2482.05,-1204.72) R62.1@2501.68,-1224.35 ; 2482.05,-1232.48 cw(c2482.05,-1260.24) R62.1@2501.68,-1240.61
AST_CTRL6: P101.89 R71.1 | length 1805.3
  Top Layer w7: P101.89@1782.91,46.9 cw(c1772.08,36.07) 1787.4,36.07 cw(c1802.72,36.07) P101.89@1791.89,46.9 ; P101.89@1787.4,80.91 1787.4,-35.07 1876.81,-124.48 2350.77,-124.48 2419.81,-193.52 2419.81,-927.48 2449.81,-957.48 R71.1@2509.81,-957.48 ; 2482.05,-957.48 cw(c2482.05,-985.24) R71.1@2501.68,-965.61 ; 2482.05,-957.48 ccw(c2482.05,-929.72) R71.1@2501.68,-949.35 ; 2482.05,-957.48 cw(c2482.05,-985.24) R71.1@2501.68,-965.61 ; 2482.05,-957.48 ccw(c2482.05,-929.72) R71.1@2501.68,-949.35 ; 2482.05,-957.48 ccw(c2482.05,-929.72) R71.1@2501.68,-949.35 ; 2482.05,-957.48 cw(c2482.05,-985.24) R71.1@2501.68,-965.61
AST_CTRL7: P101.91 R76.1 | length 1503.2
  Top Layer w7: P101.91@1814.41,46.9 cw(c1803.58,36.07) 1818.9,36.07 cw(c1834.22,36.07) P101.91@1823.39,46.9 ; P101.91@1818.9,80.91 1818.9,-21.57 1897.33,-100 2362.29,-100 2439.81,-177.52 2439.81,-657.48 2464.81,-682.48 R76.1@2509.81,-682.48 ; 2482.05,-682.48 cw(c2482.05,-710.24) R76.1@2501.68,-690.61 ; 2482.05,-682.48 ccw(c2482.05,-654.72) R76.1@2501.68,-674.35 ; 2482.05,-682.48 cw(c2482.05,-710.24) R76.1@2501.68,-690.61 ; 2482.05,-682.48 ccw(c2482.05,-654.72) R76.1@2501.68,-674.35 ; 2482.05,-682.48 ccw(c2482.05,-654.72) R76.1@2501.68,-674.35 ; 2482.05,-682.48 cw(c2482.05,-710.24) R76.1@2501.68,-690.61
AST_CTRL8: P101.93 R88.1 | length 1179
  Top Layer w7: P101.93@1845.91,46.9 cw(c1835.08,36.07) 1850.4,36.07 cw(c1865.72,36.07) P101.93@1854.89,46.9 ; P101.93@1850.4,80.91 1850.4,-8.07 1920.81,-78.48 2376.77,-78.48 2464.81,-166.52 2464.81,-372.48 2474.81,-382.48 R88.1@2509.81,-382.48 ; 2482.05,-382.48 cw(c2482.05,-410.24) R88.1@2501.68,-390.61 ; 2482.05,-382.48 ccw(c2482.05,-354.72) R88.1@2501.68,-374.35 ; 2482.05,-382.48 cw(c2482.05,-410.24) R88.1@2501.68,-390.61 ; 2482.05,-382.48 ccw(c2482.05,-354.72) R88.1@2501.68,-374.35 ; 2482.05,-382.48 ccw(c2482.05,-354.72) R88.1@2501.68,-374.35 ; 2482.05,-382.48 cw(c2482.05,-410.24) R88.1@2501.68,-390.61
BOOT0: P101.80 R128.2 S1.6 | length 3112.8
  Top Layer w7: P101.80@1625.43,288.14 ccw(c1614.6,298.97) 1629.92,298.97 ccw(c1645.24,298.97) P101.80@1634.41,288.14 ; P101.80@1629.92,254.13 1629.92,414.29 1688.15,472.52 3287.48,472.52 3425,335 v1@3425,-347.48
  Top Layer w10: S1.6@3404.81,-421.89 3404.81,-367.48 v1(3424.81,-347.48) ; v1@3419.31,-347.48 cw(c3406.03,-347.48) 3415.42,-356.87 cw(c3424.81,-366.26) v1@3424.81,-352.98 ; S1.6@3401.39,-398.78 ccw(c3393.12,-390.51) 3404.81,-390.51 ; S1.6@3401.39,-398.78 ccw(c3393.12,-390.51) 3404.81,-390.51 ; S1.6@3401.39,-398.78 ccw(c3393.12,-390.51) 3404.81,-390.51 ; 3404.81,-390.51 ccw(c3416.5,-390.51) S1.6@3408.23,-398.78 ; 3404.81,-390.51 ccw(c3416.5,-390.51) S1.6@3408.23,-398.78 ; 3404.81,-390.51 ccw(c3416.5,-390.51) S1.6@3408.23,-398.78
  Bottom Layer w10: R128.2@3424.81,-382.48 v1(3424.81,-347.48) ; R128.2@3417.74,-375.41 ccw(c3400.67,-358.34) 3424.81,-358.34 ; R128.2@3417.74,-375.41 ccw(c3400.67,-358.34) 3424.81,-358.34 ; R128.2@3417.74,-375.41 ccw(c3400.67,-358.34) 3424.81,-358.34 ; v1@3420.92,-351.37 cw(c3411.53,-360.76) 3424.81,-360.76 ; v1@3420.92,-351.37 cw(c3411.53,-360.76) 3424.81,-360.76 ; v1@3420.92,-351.37 cw(c3411.53,-360.76) 3424.81,-360.76 ; 3424.81,-360.76 cw(c3438.09,-360.76) v1@3428.7,-351.37 ; 3424.81,-360.76 cw(c3438.09,-360.76) v1@3428.7,-351.37 ; 3424.81,-360.76 cw(c3438.09,-360.76) v1@3428.7,-351.37 ; 3424.81,-358.34 ccw(c3448.95,-358.34) R128.2@3431.88,-375.41 ; 3424.81,-358.34 ccw(c3448.95,-358.34) R128.2@3431.88,-375.41 ; 3424.81,-358.34 ccw(c3448.95,-358.34) R128.2@3431.88,-375.41
BOOT1: P101.82 R127.2 S1.7 | length 3137.6
  Top Layer w7: P101.82@1656.93,288.14 ccw(c1646.1,298.97) 1661.42,298.97 ccw(c1676.74,298.97) P101.82@1665.91,288.14 ; P101.82@1661.42,254.13 1661.42,400.79 1708.15,447.52 3222.48,447.52 3365,305 v1@3365,-347.48
  Top Layer w10: S1.7@3354.81,-421.89 3354.81,-357.48 v1(3364.81,-347.48) ; v1@3359.31,-347.48 cw(c3346.03,-347.48) 3355.42,-356.87 cw(c3364.81,-366.26) v1@3364.81,-352.98 ; S1.7@3351.39,-398.78 ccw(c3343.12,-390.51) 3354.81,-390.51 ; S1.7@3351.39,-398.78 ccw(c3343.12,-390.51) 3354.81,-390.51 ; S1.7@3351.39,-398.78 ccw(c3343.12,-390.51) 3354.81,-390.51 ; 3354.81,-390.51 ccw(c3366.5,-390.51) S1.7@3358.23,-398.78 ; 3354.81,-390.51 ccw(c3366.5,-390.51) S1.7@3358.23,-398.78 ; 3354.81,-390.51 ccw(c3366.5,-390.51) S1.7@3358.23,-398.78 ; 3354.81,-384.9 cw(c3402.23,-384.9) v1@3368.7,-351.37 ; 3354.81,-384.9 cw(c3402.23,-384.9) v1@3368.7,-351.37 ; 3354.81,-384.9 cw(c3402.23,-384.9) v1@3368.7,-351.37 ; 3354.81,-360.76 cw(c3378.09,-360.76) v1@3361.63,-344.3 ; 3354.81,-360.76 cw(c3378.09,-360.76) v1@3361.63,-344.3 ; 3354.81,-360.76 cw(c3378.09,-360.76) v1@3361.63,-344.3
  Bottom Layer w10: R127.2@3364.81,-382.48 v1(3364.81,-347.48) ; R127.2@3357.74,-375.41 ccw(c3340.67,-358.34) 3364.81,-358.34 ; R127.2@3357.74,-375.41 ccw(c3340.67,-358.34) 3364.81,-358.34 ; R127.2@3357.74,-375.41 ccw(c3340.67,-358.34) 3364.81,-358.34 ; v1@3360.92,-351.37 cw(c3351.53,-360.76) 3364.81,-360.76 ; v1@3360.92,-351.37 cw(c3351.53,-360.76) 3364.81,-360.76 ; v1@3360.92,-351.37 cw(c3351.53,-360.76) 3364.81,-360.76 ; 3364.81,-360.76 cw(c3378.09,-360.76) v1@3368.7,-351.37 ; 3364.81,-360.76 cw(c3378.09,-360.76) v1@3368.7,-351.37 ; 3364.81,-360.76 cw(c3378.09,-360.76) v1@3368.7,-351.37 ; 3364.81,-358.34 ccw(c3388.95,-358.34) R127.2@3371.88,-375.41 ; 3364.81,-358.34 ccw(c3388.95,-358.34) R127.2@3371.88,-375.41 ; 3364.81,-358.34 ccw(c3388.95,-358.34) R127.2@3371.88,-375.41
BOOT2: P101.84 R126.2 S1.8 | length 2870.9
  Top Layer w7: P101.84@1688.43,288.14 ccw(c1677.6,298.97) 1692.92,298.97 ccw(c1708.24,298.97) P101.84@1697.41,288.14 ; P101.84@1692.92,254.13 1692.92,372.29 1743.15,422.52 3172.48,422.52 3305,290 v1@3305,-347.48
  Top Layer w10: S1.8@3304.81,-421.89 v1(3304.81,-347.48) ; v1@3300.92,-351.37 cw(c3291.53,-360.76) 3304.81,-360.76 ; v1@3300.92,-351.37 cw(c3291.53,-360.76) 3304.81,-360.76 ; v1@3300.92,-351.37 cw(c3291.53,-360.76) 3304.81,-360.76 ; S1.8@3301.39,-398.78 ccw(c3293.12,-390.51) 3304.81,-390.51 ; S1.8@3301.39,-398.78 ccw(c3293.12,-390.51) 3304.81,-390.51 ; S1.8@3301.39,-398.78 ccw(c3293.12,-390.51) 3304.81,-390.51 ; 3304.81,-390.51 ccw(c3316.5,-390.51) S1.8@3308.23,-398.78 ; 3304.81,-390.51 ccw(c3316.5,-390.51) S1.8@3308.23,-398.78 ; 3304.81,-390.51 ccw(c3316.5,-390.51) S1.8@3308.23,-398.78 ; 3304.81,-360.76 cw(c3318.09,-360.76) v1@3308.7,-351.37 ; 3304.81,-360.76 cw(c3318.09,-360.76) v1@3308.7,-351.37 ; 3304.81,-360.76 cw(c3318.09,-360.76) v1@3308.7,-351.37
  Bottom Layer w10: R126.2@3304.81,-382.48 v1(3304.81,-347.48) ; R126.2@3297.74,-375.41 ccw(c3280.67,-358.34) 3304.81,-358.34 ; R126.2@3297.74,-375.41 ccw(c3280.67,-358.34) 3304.81,-358.34 ; R126.2@3297.74,-375.41 ccw(c3280.67,-358.34) 3304.81,-358.34 ; v1@3300.92,-351.37 cw(c3291.53,-360.76) 3304.81,-360.76 ; v1@3300.92,-351.37 cw(c3291.53,-360.76) 3304.81,-360.76 ; v1@3300.92,-351.37 cw(c3291.53,-360.76) 3304.81,-360.76 ; 3304.81,-360.76 cw(c3318.09,-360.76) v1@3308.7,-351.37 ; 3304.81,-360.76 cw(c3318.09,-360.76) v1@3308.7,-351.37 ; 3304.81,-360.76 cw(c3318.09,-360.76) v1@3308.7,-351.37 ; 3304.81,-358.34 ccw(c3328.95,-358.34) R126.2@3311.88,-375.41 ; 3304.81,-358.34 ccw(c3328.95,-358.34) R126.2@3311.88,-375.41 ; 3304.81,-358.34 ccw(c3328.95,-358.34) R126.2@3311.88,-375.41
BOOT3: P101.86 R125.2 S1.9 | length 2930.6
  Top Layer w7: P101.86@1719.92,288.14 ccw(c1709.09,298.97) 1724.41,298.97 ccw(c1739.73,298.97) P101.86@1728.9,288.14 ; P101.86@1724.41,254.13 1724.41,358.78 1763.15,397.52 3117.48,397.52 3245,270
  Top Layer w10: v1@3244.81,-352.98 cw(c3244.81,-366.26) 3254.2,-356.87 cw(c3263.59,-347.48) v1@3250.31,-347.48 ; v1(3244.81,-347.48) 3254.81,-357.48 S1.9@3254.81,-421.89 ; v1@3245,-347.48 3245,270 ; 3245,-334.66 ccw(c3257.63,-334.66) v1@3248.7,-343.59 ; 3245,-333.74 cw(c3231.07,-333.74) v1@3240.92,-343.59 ; v1@3240.92,-351.37 cw(c3207.39,-384.9) 3254.81,-384.9 ; v1@3240.92,-351.37 cw(c3207.39,-384.9) 3254.81,-384.9 ; v1@3240.92,-351.37 cw(c3207.39,-384.9) 3254.81,-384.9 ; v1@3240.92,-343.59 ccw(c3231.53,-334.2) 3244.81,-334.2 ; v1@3240.92,-343.59 ccw(c3231.53,-334.2) 3244.81,-334.2 ; 3244.81,-334.2 ccw(c3258.09,-334.2) v1@3248.7,-343.59 ; 3244.81,-334.2 ccw(c3258.09,-334.2) v1@3248.7,-343.59 ; v1@3247.99,-344.3 cw(c3231.53,-360.76) 3254.81,-360.76 ; v1@3247.99,-344.3 cw(c3231.53,-360.76) 3254.81,-360.76 ; v1@3247.99,-344.3 cw(c3231.53,-360.76) 3254.81,-360.76 ; S1.9@3251.39,-398.78 ccw(c3243.12,-390.51) 3254.81,-390.51 ; S1.9@3251.39,-398.78 ccw(c3243.12,-390.51) 3254.81,-390.51 ; S1.9@3251.39,-398.78 ccw(c3243.12,-390.51) 3254.81,-390.51 ; 3254.81,-390.51 ccw(c3266.5,-390.51) S1.9@3258.23,-398.78 ; 3254.81,-390.51 ccw(c3266.5,-390.51) S1.9@3258.23,-398.78 ; 3254.81,-390.51 ccw(c3266.5,-390.51) S1.9@3258.23,-398.78
  Bottom Layer w10: R125.2@3244.81,-382.48 v1(3244.81,-347.48) ; R125.2@3237.74,-375.41 ccw(c3220.67,-358.34) 3244.81,-358.34 ; R125.2@3237.74,-375.41 ccw(c3220.67,-358.34) 3244.81,-358.34 ; R125.2@3237.74,-375.41 ccw(c3220.67,-358.34) 3244.81,-358.34 ; v1@3240.92,-351.37 cw(c3231.53,-360.76) 3244.81,-360.76 ; v1@3240.92,-351.37 cw(c3231.53,-360.76) 3244.81,-360.76 ; v1@3240.92,-351.37 cw(c3231.53,-360.76) 3244.81,-360.76 ; 3244.81,-360.76 cw(c3258.09,-360.76) v1@3248.7,-351.37 ; 3244.81,-360.76 cw(c3258.09,-360.76) v1@3248.7,-351.37 ; 3244.81,-360.76 cw(c3258.09,-360.76) v1@3248.7,-351.37 ; 3244.81,-358.34 ccw(c3268.95,-358.34) R125.2@3251.88,-375.41 ; 3244.81,-358.34 ccw(c3268.95,-358.34) R125.2@3251.88,-375.41 ; 3244.81,-358.34 ccw(c3268.95,-358.34) R125.2@3251.88,-375.41
BOOT4: P101.88 R124.2 S1.10 | length 2660.5
  Top Layer w7: P101.88@1751.42,288.14 ccw(c1740.59,298.97) 1755.91,298.97 ccw(c1771.23,298.97) P101.88@1760.4,288.14 ; P101.88@1755.91,254.13 1755.91,350.28 1783.15,377.52 3057.48,377.52 3185,250 v1@3185,-347.48 ; 3185,-331.04 ccw(c3201.25,-331.04) v1@3189.76,-342.53 ; 3185,-330.12 cw(c3167.45,-330.12) v1@3179.86,-342.53 ; v1@3179.86,-342.53 ccw(c3167.91,-330.58) 3184.81,-330.58 ; v1@3179.86,-342.53 ccw(c3167.91,-330.58) 3184.81,-330.58 ; 3184.81,-330.58 ccw(c3201.71,-330.58) v1@3189.76,-342.53 ; 3184.81,-330.58 ccw(c3201.71,-330.58) v1@3189.76,-342.53
  Top Layer w10: v1@3184.81,-352.98 cw(c3184.81,-366.26) 3194.2,-356.87 cw(c3203.59,-347.48) v1@3190.31,-347.48 ; v1(3184.81,-347.48) 3204.81,-367.48 S1.10@3204.81,-421.89 ; S1.10@3201.39,-398.78 ccw(c3193.12,-390.51) 3204.81,-390.51 ; S1.10@3201.39,-398.78 ccw(c3193.12,-390.51) 3204.81,-390.51 ; S1.10@3201.39,-398.78 ccw(c3193.12,-390.51) 3204.81,-390.51 ; 3204.81,-390.51 ccw(c3216.5,-390.51) S1.10@3208.23,-398.78 ; 3204.81,-390.51 ccw(c3216.5,-390.51) S1.10@3208.23,-398.78 ; 3204.81,-390.51 ccw(c3216.5,-390.51) S1.10@3208.23,-398.78
  Bottom Layer w10: R124.2@3184.81,-382.48 v1(3184.81,-347.48) ; R124.2@3177.74,-375.41 ccw(c3160.67,-358.34) 3184.81,-358.34 ; R124.2@3177.74,-375.41 ccw(c3160.67,-358.34) 3184.81,-358.34 ; R124.2@3177.74,-375.41 ccw(c3160.67,-358.34) 3184.81,-358.34 ; v1@3180.92,-351.37 cw(c3171.53,-360.76) 3184.81,-360.76 ; v1@3180.92,-351.37 cw(c3171.53,-360.76) 3184.81,-360.76 ; v1@3180.92,-351.37 cw(c3171.53,-360.76) 3184.81,-360.76 ; 3184.81,-360.76 cw(c3198.09,-360.76) v1@3188.7,-351.37 ; 3184.81,-360.76 cw(c3198.09,-360.76) v1@3188.7,-351.37 ; 3184.81,-360.76 cw(c3198.09,-360.76) v1@3188.7,-351.37 ; 3184.81,-358.34 ccw(c3208.95,-358.34) R124.2@3191.88,-375.41 ; 3184.81,-358.34 ccw(c3208.95,-358.34) R124.2@3191.88,-375.41 ; 3184.81,-358.34 ccw(c3208.95,-358.34) R124.2@3191.88,-375.41
BOOT5: P101.90 R131.2 | length 2238.7
  Top Layer w7: P101.90@1782.91,288.14 ccw(c1772.08,298.97) 1787.4,298.97 ccw(c1802.72,298.97) P101.90@1791.89,288.14 ; P101.90@1787.4,254.13 1787.4,326.77 1818.15,357.52 3007.48,357.52 3100,265 R131.2@3100,-382.48 ; 3100,-355.18 ccw(c3127.11,-355.18) R131.2@3107.94,-374.35 ; 3100,-354.26 cw(c3071.59,-354.26) R131.2@3091.68,-374.35 ; R131.2@3091.68,-374.35 ccw(c3072.05,-354.72) 3099.81,-354.72 ; R131.2@3091.68,-374.35 ccw(c3072.05,-354.72) 3099.81,-354.72 ; 3099.81,-354.72 ccw(c3127.57,-354.72) R131.2@3107.94,-374.35 ; 3099.81,-354.72 ccw(c3127.57,-354.72) R131.2@3107.94,-374.35
BOOT6: P101.92 R130.2 | length 2119.8
  Top Layer w7: P101.92@1814.41,288.14 ccw(c1803.58,298.97) 1818.9,298.97 ccw(c1834.22,298.97) P101.92@1823.39,288.14 ; P101.92@1818.9,254.13 1818.9,313.27 1843.15,337.52 2962.48,337.52 3040,260 R130.2@3040,-382.48 ; 3040,-355.18 ccw(c3067.11,-355.18) R130.2@3047.94,-374.35 ; 3040,-354.26 cw(c3011.59,-354.26) R130.2@3031.68,-374.35 ; R130.2@3031.68,-374.35 ccw(c3012.05,-354.72) 3039.81,-354.72 ; R130.2@3031.68,-374.35 ccw(c3012.05,-354.72) 3039.81,-354.72 ; 3039.81,-354.72 ccw(c3067.57,-354.72) R130.2@3047.94,-374.35 ; 3039.81,-354.72 ccw(c3067.57,-354.72) R130.2@3047.94,-374.35
BOOT7: P101.94 R129.2 | length 1997.9
  Top Layer w7: P101.94@1845.91,288.14 ccw(c1835.08,298.97) 1850.4,298.97 ccw(c1865.72,298.97) P101.94@1854.89,288.14 ; P101.94@1850.4,254.13 1850.4,299.77 1868.15,317.52 2912.48,317.52 2980,250 R129.2@2980,-382.48 ; 2980,-355.18 ccw(c3007.11,-355.18) R129.2@2987.94,-374.35 ; 2980,-354.26 cw(c2951.59,-354.26) R129.2@2971.68,-374.35 ; R129.2@2971.68,-374.35 ccw(c2952.05,-354.72) 2979.81,-354.72 ; R129.2@2971.68,-374.35 ccw(c2952.05,-354.72) 2979.81,-354.72 ; 2979.81,-354.72 ccw(c3007.57,-354.72) R129.2@2987.94,-374.35 ; 2979.81,-354.72 ccw(c3007.57,-354.72) R129.2@2987.94,-374.35
FJTAG_TCK: JP2.1 P101.99 | length 776.9
  Top Layer w7: P101.99@1940.39,46.9 cw(c1929.56,36.07) 1944.88,36.07 cw(c1960.2,36.07) P101.99@1949.37,46.9 ; P101.99@1944.88,80.91 1944.88,35.12 2015,-35 2450,-35 2517.29,32.29 JP2.1@2517.29,110
FJTAG_TDI: JP2.9 P101.100 | length 1137.8
  Top Layer w7: P101.100@1944.88,254.13 1994.13,254.13 2022,282 2845.29,282 2872.29,255 2872.29,155 JP2.9@2917.29,110 ; P101.100@1949.37,249.64 cw(c1960.2,238.81) 1960.2,254.13 cw(c1960.2,269.45) P101.100@1949.37,258.62
FJTAG_TDO: JP2.3 P101.97 | length 928.6
  Top Layer w7: P101.97@1908.9,46.9 cw(c1898.07,36.07) 1913.39,36.07 cw(c1928.71,36.07) P101.97@1917.88,46.9 ; P101.97@1913.39,80.91 1913.39,33.9 2002.29,-55 2535,-55 2617.29,27.29 JP2.3@2617.29,110
FJTAG_TMS: JP2.5 P101.98 | length 947.3
  Top Layer w7: P101.98@1908.9,220.12 cw(c1898.07,209.29) 1913.39,209.29 cw(c1928.71,209.29) P101.98@1917.88,220.12 ; P101.98@1913.39,254.13 1913.39,208.9 1922.29,200 1985,200 2025,240 2385,240 2465,160 2667.29,160 JP2.5@2717.29,110
FPGA_LED0: D4.K P102.87 | length 994.2
  Top Layer w7: P102.87@1751.42,2081.9 cw(c1740.59,2071.07) 1755.91,2071.07 cw(c1771.23,2071.07) P102.87@1760.4,2081.9 ; P102.87@1755.91,2115.91 1755.91,1939.09 1846.48,1848.52 2412.29,1848.52 2452.29,1888.52 D4.K@2495.15,1888.52
FPGA_LED1: D5.K P102.89 | length 991.9
  Top Layer w7: P102.89@1782.91,2081.9 cw(c1772.08,2071.07) 1787.4,2071.07 cw(c1802.72,2071.07) P102.89@1791.89,2081.9 ; P102.89@1787.4,2115.91 1787.4,1967.6 1858.61,1896.39 2368.06,1896.39 2397.29,1925.62 2397.29,1985 2420.81,2008.52 D5.K@2496.15,2008.52
FPGA_LED2: D6.K P102.91 | length 992.9
  Top Layer w7: P102.91@1814.41,2081.9 cw(c1803.58,2071.07) 1818.9,2071.07 cw(c1834.22,2071.07) P102.91@1823.39,2081.9 ; P102.91@1818.9,2115.91 1818.9,1996.1 1870,1945 2325,1945 2362.68,1982.68 2362.68,2105.39 2394.81,2137.52 D6.K@2495.15,2137.52
FPGA_RX: P101.50 R167.1 | length 946.4
  Top Layer w7: R167.1@1125,1105 1125,1050 1055,980 1055,450 1157.48,347.52 P101.50@1157.48,254.13 ; P101.50@1152.99,288.14 ccw(c1142.16,298.97) 1157.48,298.97 ccw(c1172.8,298.97) P101.50@1161.97,288.14
FPGA_TX: P101.48 R165.1 | length 958
  Top Layer w7: R165.1@1005,1105 990,1090 990,405 1040,355 1075,355 1125.99,304.01 P101.48@1125.99,254.13 ; P101.48@1121.5,288.14 ccw(c1110.67,298.97) 1125.99,298.97 ccw(c1141.31,298.97) P101.48@1130.48,288.14